# EAGLE board DS1338C_Breakout (EAGLE 6.4)
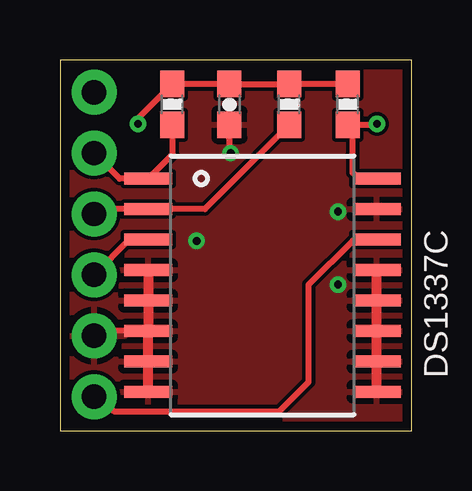
[diagram p0: board, top side]
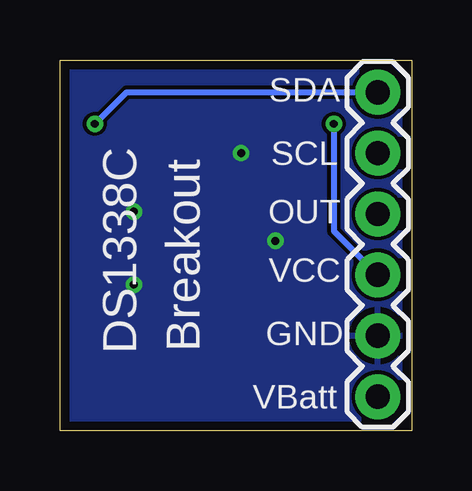
[diagram p1: board, bottom side, seen from below]

Size 14.66 x 15.47 mm. Coordinates in mm from the lower left corner, seen from the top.
Outline: 0,0 14.66,0 14.66,15.47 0,15.47 0,0
Copper layers (1*16): Top 0.0356mm / dielectric 1.5011mm / Bottom 0.0356mm
Design rules "LaenPCBOrder *": minimum track width 6mil, minimum drill 13mil, track to track 6mil, track to pad 6mil, pad to pad 6mil, via to via 6mil, smd to smd 6mil, copper to edge 15mil, drill to drill 6mil, minimum pad ring 7mil, minimum via ring 7mil, stop-mask expansion 4mil, vias tented up to drill 13mil, thermal gap 10mil

## Footprints (pad centres in the part's own frame; a part is rotated, then mirrored left to right if it is on the bottom)
0603-CAP = smd 1.1 x 1: 1 -0.85,0; 2 0.85,0
DS1337C = smd 2 x 0.5: 1 -4.763,5.08; 2 -4.763,3.81; 3 -4.763,2.54; 4 -4.763,1.27; 5 -4.763,0; 6 -4.763,-1.27; 7 -4.763,-2.54; 8 -4.763,-3.81; 9 4.763,-3.81; 10 4.763,-2.54; 11 4.763,-1.27; 12 4.763,0; 13 4.763,1.27; 14 4.763,2.54; 15 4.763,3.81; 16 4.763,5.08
1X06 = drill 1.016 pad 1.88: 1 0,0; 2 2.54,0; 3 5.08,0; 4 7.62,0; 5 10.16,0; 6 12.7,0
0603-RES = smd 1.1 x 1: 1 -0.85,0; 2 0.85,0

## Placement (x,y rotation side)
C1  100nF  [0603-CAP]  7.06,13.61 270 top
DS1337C  DS1337C  [DS1337C]  8.43,5.44 0 top
JP1  [1X06]  1.42,14.12 270 bottom
R1  [0603-RES]  11.99,13.61 90 top
R2  [0603-RES]  4.67,13.61 90 top
R3  [0603-RES]  9.55,13.61 90 top

## Library data of the parts
C1 R1-R3 = SparkFun-Passives
DS1337C = DS1337C
JP1 = SparkFun-Connectors

## Nets
!INTB: DS1337C.2 JP1.3 R3.1
GND: C1.2 DS1337C.4 DS1337C.5 DS1337C.6 DS1337C.7 DS1337C.8 DS1337C.9 DS1337C.10 DS1337C.11 DS1337C.12 DS1337C.13 DS1337C.15 JP1.5
SCL: DS1337C.1 JP1.2 R2.1
SDA: DS1337C.16 JP1.1 R1.1
VBAT: DS1337C.14 JP1.6
VCC: C1.1 DS1337C.3 JP1.4 R1.2 R2.2 R3.2

## Tracks (layer width: path | path; a pad name or v marks a point on that pad's centre or on a via)
!INTB
  Top 0.254: JP1.3 1.63,9.25 DS1337C.2 6.03,9.25 R3.1
GND  (via drill 0.33)
  Top 0.254: DS1337C.6 1.63,4.17 JP1.5 | C1.2 7.06,11.84 v7.11,11.58
  Top 0.406: DS1337C.4 DS1337C.5 DS1337C.6 DS1337C.7 DS1337C.8 | DS1337C.9 DS1337C.10 DS1337C.11 DS1337C.12 DS1337C.13
  other vias: 11.58,9.14 11.58,6.1 5.69,7.92
  pour Bottom: 0.2,0 0.2,15.24 14.63,15.24 14.63,0
  pour Top: 0.2,0 0.2,15.44 14.63,15.44 14.63,0
SCL
  Top 0.254: JP1.2 2.49,10.52 DS1337C.1 4.67,11.52 R2.1
SDA  (via drill 0.33)
  Top 0.254: DS1337C.16 12.45,10.52 12.19,10.77 12.19,12.56 R1.1 13.17,12.76 v13.21,12.8
  Bottom 0.254: v13.21,12.8 11.89,14.12 JP1.1
VBAT
  Top 0.254: JP1.6 1.63,1.42 2.23,0.81 9.14,0.81 10.36,2.03 10.36,6.1 12.19,7.92 13.14,7.92 DS1337C.14
VCC  (via drill 0.33)
  Top 0.254: DS1337C.3 2.9,7.98 JP1.4 | R1.2 11.95,14.43 11.91,14.46 R3.2 | R3.2 9.5,14.52 | v3.25,12.8 3.25,13.04 R2.2 C1.1 R3.2
  Bottom 0.254: v3.25,12.8 3.25,8.33 JP1.4

## Text on the board
bPlace: SDA | SCL | OUT | DS1338C | VCC | Breakout | GND | VBatt